# Altium PCB PCB1.PcbDoc
Units mm, origin at the board's own origin, x right, y up, seen from the top; angles counter-clockwise.
Board outline 44.96 x 25 mm, 2 copper layers (Top Layer, Bottom Layer); 9 components, 10 nets, 64 pads, 2 vias.
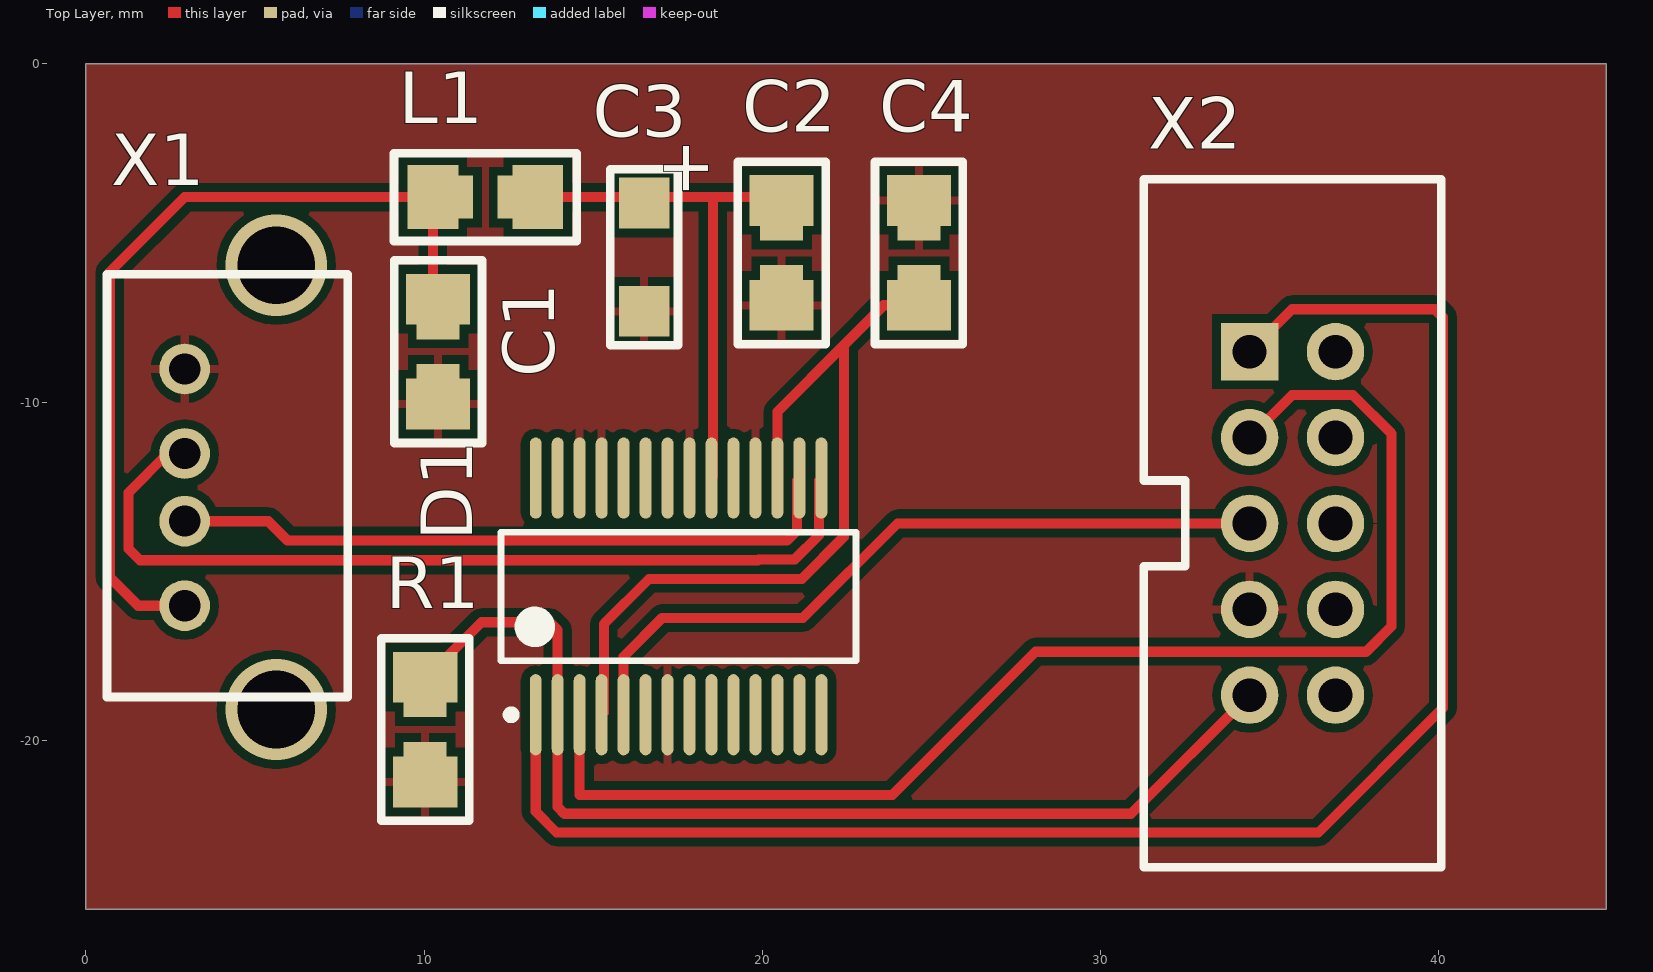
[diagram p0: Top Layer view]
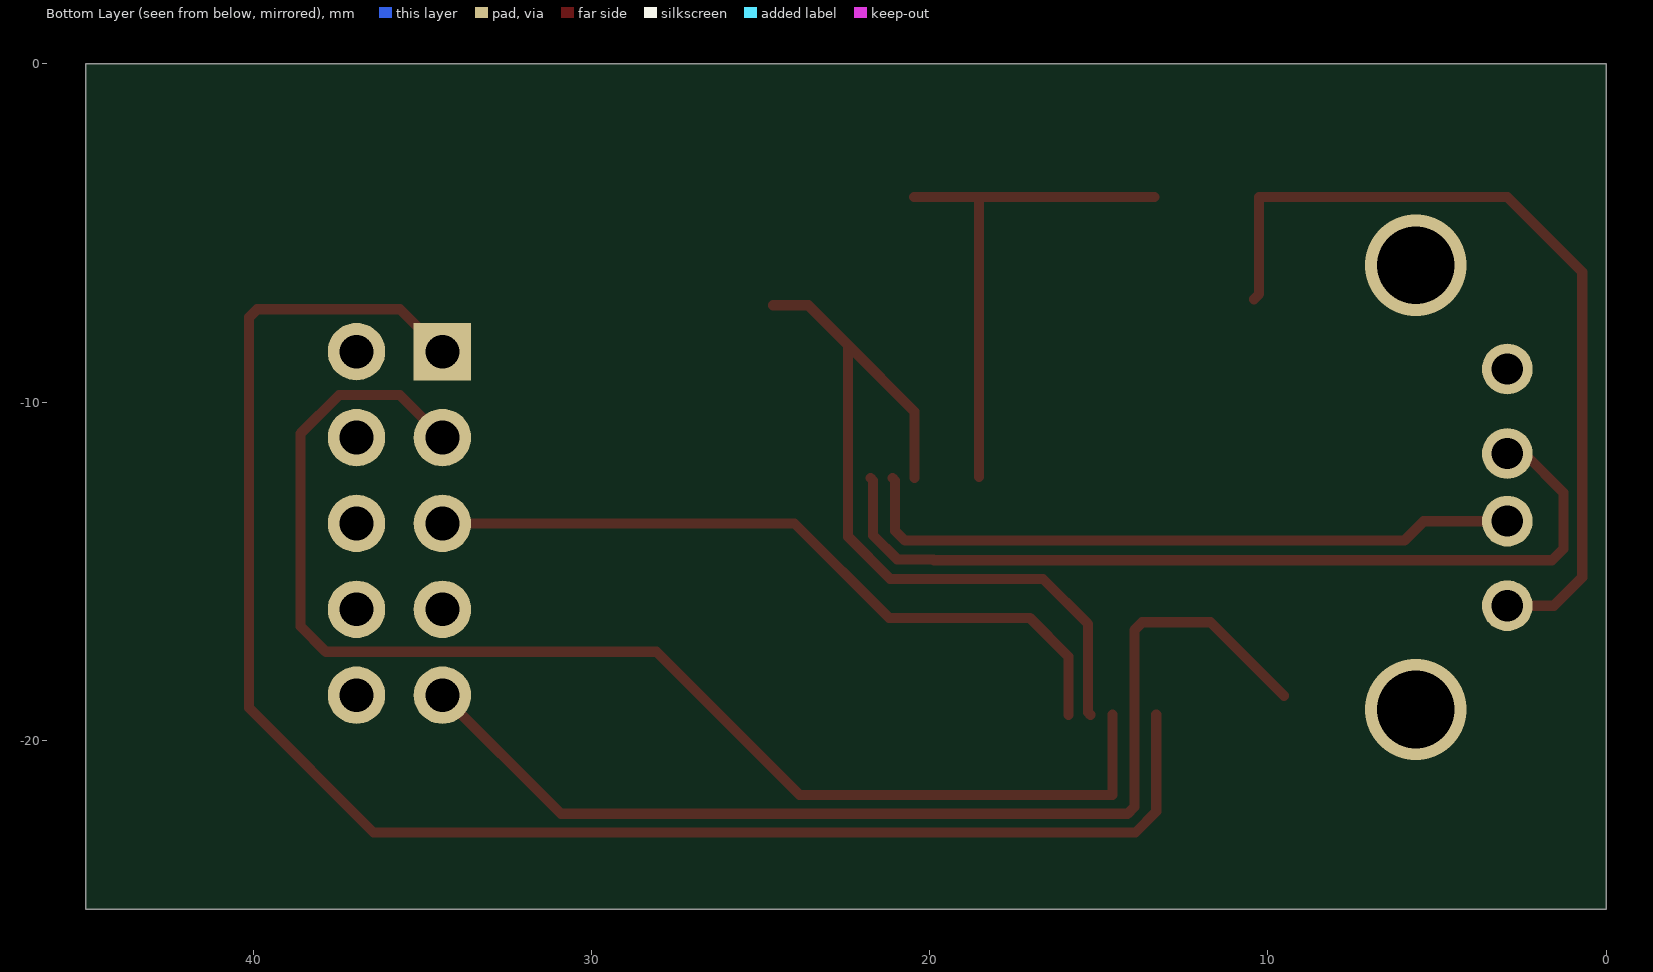
[diagram p1: Bottom Layer view, seen from below]

## Layer stack, top to bottom
Top Solder: solder mask 0.0102, Solder Resist, Dk 3.5
Top Layer: signal copper 0.0356
Dielectric 1: dielectric 0.32, FR-4, Dk 4.8
Bottom Layer: signal copper 0.0356
Bottom Solder: solder mask 0.0102, Solder Resist, Dk 3.5

## Board outline
0,-25 0,0 44.958,0 44.958,-25

## Design rules (kind name [scope] priority, off if disabled: settings)
Clearance [All] p1: gap=0.254
PolygonConnect [All] p1: connectstyle=Relief reliefconductorwidth=0.254 reliefentries=4 polygonreliefangle="90 Angle" airgapwidth=0.254
RoutingVias [All] p1: holewidth=0.711 width=1.27 viastyle="Through Hole" minholewidth=0.711 minwidth=1.27 maxholewidth=0.711 maxwidth=1.27
SilkToSilkClearance [All] p1 off: silktosilkclearance=0.254
SolderMaskExpansion [All] p1: expansion=0.102
Width [All] p1: maxlimit=0.3 minlimit=0.3 preferedwidth=0.3 minimp=50.000000 maximp=50.000000 favimp=50.000000
29 further rules are at their usual default settings.

## Components (designator, comment, footprint, x,y, rotation, side; value= is the part's Value field where it differs from the comment)
C1 "10n" C_0805 10.414,-8.509 r270 top
C2 "0.1uF" C_0805 20.574,-5.588 r270 top
C3 "4.7uF" C_TECAP_A 16.51,-5.715 r270 top
C4 "1uF" C_0805 24.638,-5.588 r270 top
D1 "FT232RL-Reel" SSOP-28_M 17.526,-15.748 r90 top
L1 "Ferrite Bead" R_0805 11.811,-3.937 r0 top
R1 "10k" R_0805 10.033,-19.685 r90 top
X1 "USB_A_female" USB_A_female 4.826,-12.573 r90 top
X2 "IDC-10" IDC-10 35.687,-13.589 r0 top

## Footprints (in the part's own frame and the unit in brackets; to place one, negate y for a bottom-side part, rotate by r counter-clockwise, add the part's x,y. Pads: shape width x height; smd on the part's side, far side on the other; paste and mask are expansions set on the pad)
C_0805 [mm]
  rect 1.5x1.9 smd: 1(-1.55,0) 2(1.55,0)
  rect 1.27x1.27 smd: 1(-1,0) 2(1,0)
  silkscreen extent -2.7,-1.3 2.7,1.3
C_TECAP_A [mm]
  rect 1.5x1.5 smd: 2(1.6,0) +(-1.6,0)
  silkscreen extent -2.6,-1 2.6,1
IDC-10 [mm]
  rect 1.7x1.7 hole 1: 1(-1.27,5.08)
  round 1.7 hole 1: 2(1.27,5.08) 3(-1.27,2.54) 4(1.27,2.54) 5(-1.27,0) 6(1.27,0) 7(-1.27,-2.54) 8(1.27,-2.54) 9(-1.27,-5.08) 10(1.27,-5.08)
  silkscreen extent -4.4,-10.18 4.4,10.18
R_0805 [mm]
  rect 1.5x1.9 smd: 1(-1.55,0) 2(1.55,0)
  rect 1.27x1.27 smd: 1(-1,0) 2(1,0)
  silkscreen extent -2.7,-1.3 2.7,1.3
SSOP-28_M [mm] "SOP, 28-Leads, Body 10.2x5.3mm, Pitch 0.65mm, IPC Low Density"
  oval 2.4x0.35 smd: 1(-3.5,4.225) 2(-3.5,3.575) 3(-3.5,2.925) 4(-3.5,2.275) 5(-3.5,1.625) 6(-3.5,0.975) 7(-3.5,0.325) 8(-3.5,-0.325) 9(-3.5,-0.975) 10(-3.5,-1.625) 11(-3.5,-2.275) 12(-3.5,-2.925) 13(-3.5,-3.575) 14(-3.5,-4.225) 15(3.5,-4.225) 16(3.5,-3.575) 17(3.5,-2.925) 18(3.5,-2.275) 19(3.5,-1.625) 20(3.5,-0.975) 21(3.5,-0.325) 22(3.5,0.325) 23(3.5,0.975) 24(3.5,1.625) 25(3.5,2.275) 26(3.5,2.925) 27(3.5,3.575) 28(3.5,4.225)
  silkscreen extent -3.62,-5.25 1.9,5.25, body extent -2.8,-5.25 2.8,5.25, height 2
USB_A_female [mm]
  round 1.5 hole 0.92: 1(-3.45,1.905) 2(-0.95,1.905) 3(1.05,1.905) 4(3.55,1.905)
  silkscreen extent -6.15,-2.92 6.35,4.21

## Part data
C1 C2 C4: library part "capacitor 0805"
C3: library part capacitor_TECAP_SMD_A
D1: "USB UART Asynchronous Serial Data Transfer Chip, SSOP-28, Tape and Reel"
L1: library part inductance_cm453232
R1: library part "resistor 0805"
X2: "разъем 4130"

## Via types
v1: diameter 3, hole 2.3, Top Layer to Bottom Layer, 2 vias

## Nets (pads, with @x,y where several pads share a name; then routed paths per layer and width w, separated by ;. In a path a pad name is that pad's centre, name@x,y a point inside that pad or via, vN(x,y) a via of type N, cw(c..) or ccw(c..) an arc to the next point about the centre after c; other vN are vias at no path point)
+5: C1.1 L1.1 X1.1 | length 24.6
  Top Layer w0.3: X1.1@2.413,-16.023 1.545,-16.023 0.705,-15.183 0.705,-6.153 2.921,-3.937 10.261,-3.937 10.261,-6.806 C1.1@10.414,-6.959
GND: C1.2 C2.2 C3.2 C4.1 D1.7 D1.18 D1.21 D1.25 D1.26 R1.1 X1.4 X2.7
NetD1_1: D1.1 X2.1 | length 49.4
  Top Layer w0.3: D1.1 13.301,-22.111 13.919,-22.729 36.453,-22.729 40.132,-19.05 40.132,-7.493 39.894,-7.255 35.671,-7.255 X2.1
NetD1_2: D1.2 R1.2 X2.9 | length 32.7
  Top Layer w0.3: R1.2@9.525,-18.685 11.7,-16.51 13.716,-16.51 13.951,-16.745 D1.2 13.951,-21.978 14.148,-22.175 30.911,-22.175 X2.9
NetD1_3: D1.3 X2.3 | length 39.3
  Top Layer w0.3: D1.3 14.601,-21.621 23.845,-21.621 28.083,-17.383 37.862,-17.383 38.608,-16.637 38.608,-10.927 37.476,-9.795 35.671,-9.795 X2.3
NetD1_5: D1.5 X2.5 | length 21.9
  Top Layer w0.3: D1.5 15.901,-17.526 17.044,-16.383 21.209,-16.383 24.003,-13.589 X2.5
NetD1_15: D1.15 X1.3 | length 25.9
  Top Layer w0.3: X1.3@2.413,-11.523 1.259,-12.677 1.259,-14.34 1.596,-14.677 19.867,-14.677 19.893,-14.651 20.966,-14.651 21.68,-13.937 21.68,-12.319 D1.15
NetD1_16: D1.16 X1.2 | length 20.9
  Top Layer w0.3: X1.2@2.413,-13.523 X1.2@2.987,-14.097 ; X1.2 5.395,-13.523 5.969,-14.097 20.737,-14.097 21.03,-13.804 21.03,-12.319 D1.16
VCC: C2.1 C3.+ D1.20 L1.2 | length 15.4
  Top Layer w0.3: L1.2@13.361,-3.937 18.542,-3.937 ; D1.20@18.542,-12.207 18.542,-3.937 ; C2.1@20.473,-3.937 18.542,-3.937
VCCIO: C4.2 D1.4 D1.17 | length 24
  Top Layer w0.3: D1.4 15.322,-19.177 15.322,-16.56 16.651,-15.231 21.17,-15.231 22.415,-13.985 22.415,-8.319 ; D1.17 20.451,-10.283 22.415,-8.319 ; C4.2@24.638,-7.138 23.596,-7.138 22.415,-8.319
pads on no net: D1.6 D1.8 D1.9 D1.10 D1.11 D1.12 D1.13 D1.14 D1.19 D1.22 D1.23 D1.24 D1.27 D1.28 X2.2 X2.4 X2.6 X2.8 X2.10
copper on no net:
  other v1: 5.631,-19.093 5.631,-5.953

## Polygon pours and split planes (outlines as drawn)
GND on Top Layer "Top Layer-No Net" (solid, pour order 2): 0,0 44.958,0 44.958,-25 0,-25

## Silkscreen, mask and mechanical layers (free items; w line width, h text height)
Mechanical 1:
  the board outline again, w0.254

## Text inside footprints (layer, text, board x,y; h text height)
C3: Top Overlay "+" at 17.11,-2.215 h1.52 r270